# EAGLE board main1 (EAGLE 7.7.0)
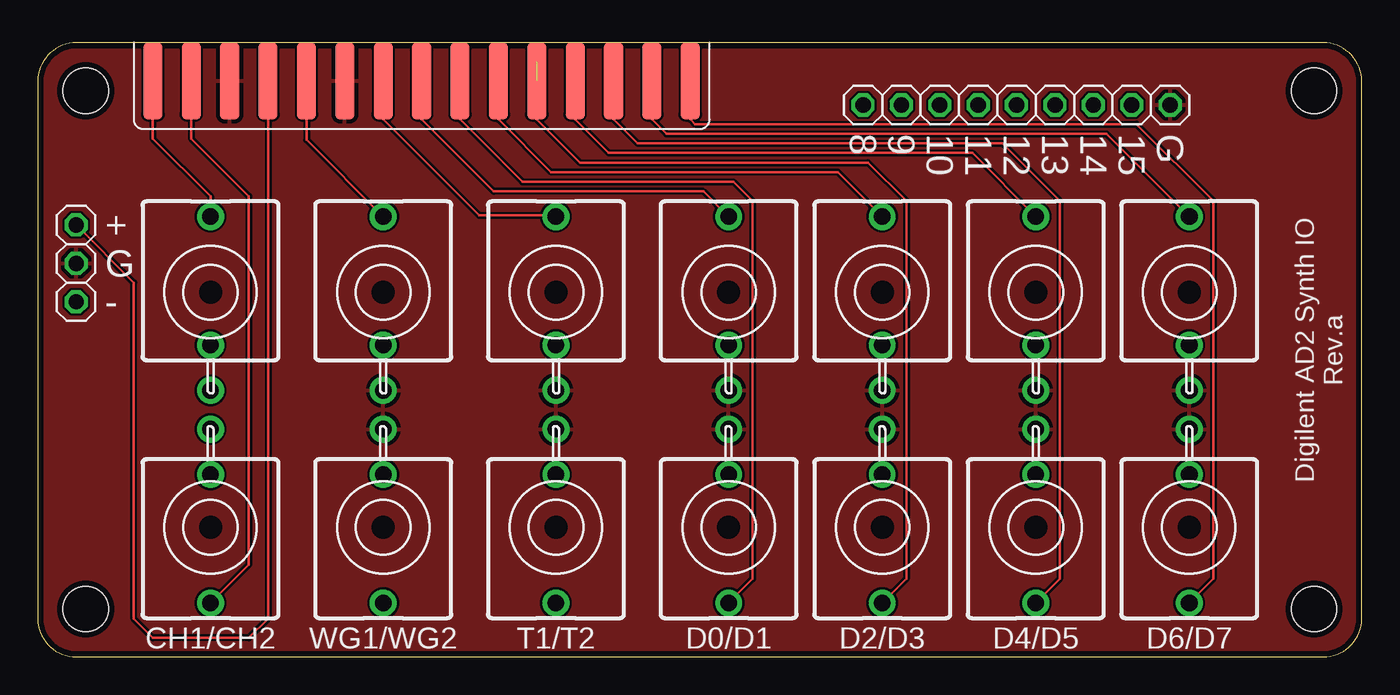
[diagram p0: board, top side]
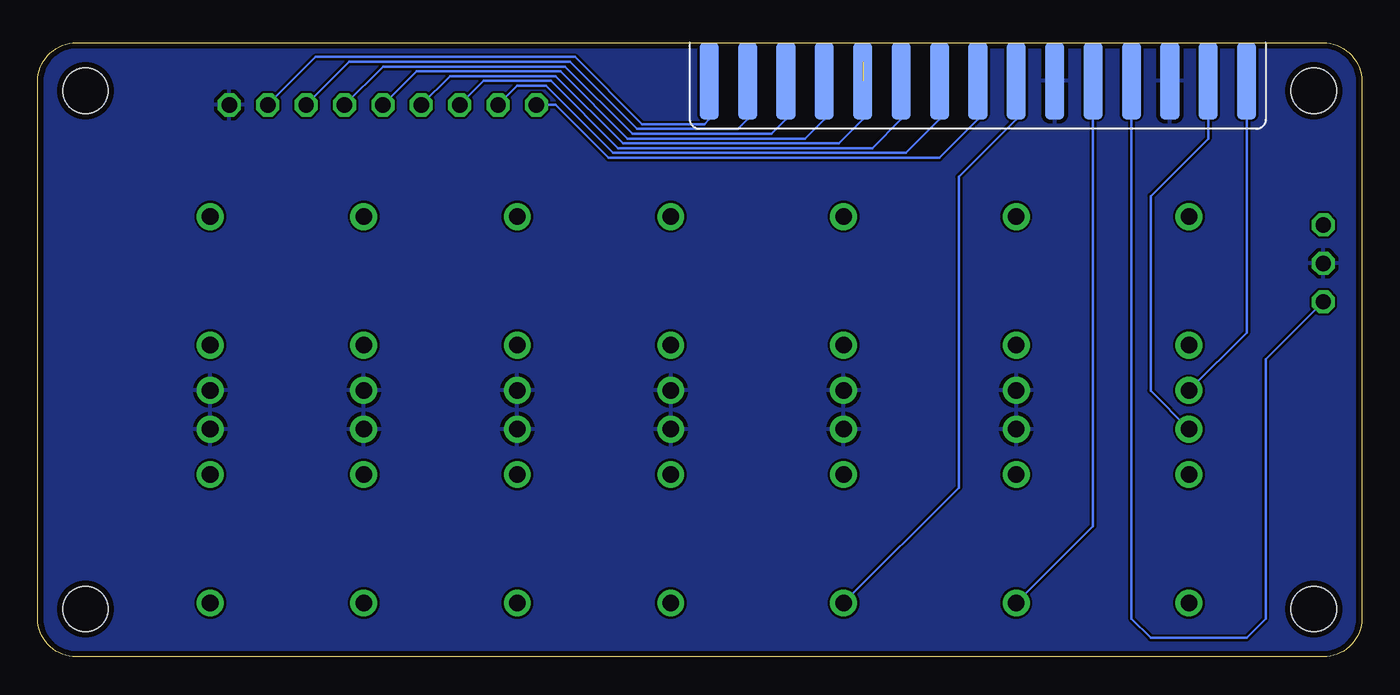
[diagram p1: board, bottom side, seen from below]

Size 87.61 x 40.63 mm. Coordinates in mm from the lower left corner, seen from the top.
Outline: 85.07,40.63 2.54,40.63 arc90 0,38.09 0,2.54 arc90 2.54,0 85.07,0 arc90 87.61,2.54 87.61,38.09 arc90 85.07,40.63
Copper layers (1*16): Top 0.0356mm / dielectric 1.5011mm / Bottom 0.0356mm
Design rules "oshpark-2layer": minimum track width 6mil, minimum drill 13mil, track to track 6mil, track to pad 6mil, pad to pad 6mil, via to via 6mil, smd to smd 6mil, copper to edge 15mil, drill to drill 6mil, minimum pad ring 7mil, minimum via ring 7mil, stop-mask expansion 2.5mil, vias tented up to drill 0mil, thermal gap 10mil
Holes 3 mm at 3.17,37.46 3.17,3.18 84.45,37.46 84.45,3.18

## Footprints (pad centres in the part's own frame; a part is rotated, then mirrored left to right if it is on the bottom)
WQP-PJ301M-12_JACK = drill 1.1 pad 1.778: P1 0,5; P2 0,-3.5; P3 0,-6.5
2X15/EDGE = smd 1.27 x 5.08: P1 -17.78,-2.54; P3 -15.24,-2.54; P5 -12.7,-2.54; P7 -10.16,-2.54; P9 -7.62,-2.54; P11 -5.08,-2.54; P13 -2.54,-2.54; P15 0,-2.54; P17 2.54,-2.54; P19 5.08,-2.54; P21 7.62,-2.54; P23 10.16,-2.54; P25 12.7,-2.54; P27 15.24,-2.54; P29 17.78,-2.54 | smd 1.27 x 5.08 bottom: P2 -17.78,-2.54; P4 -15.24,-2.54; P6 -12.7,-2.54; P8 -10.16,-2.54; P10 -7.62,-2.54; P12 -5.08,-2.54; P14 -2.54,-2.54; P16 0,-2.54; P18 2.54,-2.54; P20 5.08,-2.54; P22 7.62,-2.54; P24 10.16,-2.54; P26 12.7,-2.54; P28 15.24,-2.54; P30 17.78,-2.54
1X03/OCT = drill 1.016 octagon: 1 -2.54,0; 2 0,0; 3 2.54,0
1X09/OCT = drill 1.016 octagon: 1 -10.16,0; 2 -7.62,0; 3 -5.08,0; 4 -2.54,0; 5 0,0; 6 2.54,0; 7 5.08,0; 8 7.62,0; 9 10.16,0

## Placement (x,y rotation side)
CH1  THONKICONN  [WQP-PJ301M-12_JACK]  11.43,24.13 0 top
CH2  THONKICONN  [WQP-PJ301M-12_JACK]  11.43,8.57 180 top
DIO0  THONKICONN  [WQP-PJ301M-12_JACK]  45.72,24.13 0 top
DIO1  THONKICONN  [WQP-PJ301M-12_JACK]  45.72,8.57 180 top
DIO2  THONKICONN  [WQP-PJ301M-12_JACK]  55.88,24.13 0 top
DIO3  THONKICONN  [WQP-PJ301M-12_JACK]  55.88,8.57 180 top
DIO4  THONKICONN  [WQP-PJ301M-12_JACK]  66.04,24.13 0 top
DIO5  THONKICONN  [WQP-PJ301M-12_JACK]  66.04,8.57 180 top
DIO6  THONKICONN  [WQP-PJ301M-12_JACK]  76.2,24.13 0 top
DIO7  THONKICONN  [WQP-PJ301M-12_JACK]  76.2,8.57 180 top
JP1  [2X15/EDGE]  25.4,40.64 0 top
JP3  [1X03/OCT]  2.54,26.04 90 top
JP4  [1X09/OCT]  64.77,36.51 0 top
T1  THONKICONN  [WQP-PJ301M-12_JACK]  34.29,24.13 0 top
T2  THONKICONN  [WQP-PJ301M-12_JACK]  34.29,8.57 180 top
WG1  THONKICONN  [WQP-PJ301M-12_JACK]  22.86,24.13 0 top
WG2  THONKICONN  [WQP-PJ301M-12_JACK]  22.86,8.57 180 top

## Library data of the parts
CH1 CH2 DIO0 DIO1-DIO7 JP1 JP3 JP4 T1 T2 WG1 WG2 = _JC

## Nets
CH1+: CH1.P1 JP1.P1
CH1-: CH1.P3 JP1.P2
CH2+: CH2.P1 JP1.P3
CH2-: CH2.P3 JP1.P4
DIO0: DIO0.P1 JP1.P15
DIO1: DIO1.P1 JP1.P17
DIO2: DIO2.P1 JP1.P19
DIO3: DIO3.P1 JP1.P21
DIO4: DIO4.P1 JP1.P23
DIO5: DIO5.P1 JP1.P25
DIO6: DIO6.P1 JP1.P27
DIO7: DIO7.P1 JP1.P29
DIO8: JP1.P16 JP4.1
DIO9: JP1.P18 JP4.2
DIO10: JP1.P20 JP4.3
DIO11: JP1.P22 JP4.4
DIO12: JP1.P24 JP4.5
DIO13: JP1.P26 JP4.6
DIO14: JP1.P28 JP4.7
DIO15: JP1.P30 JP4.8
GND: DIO0.P3 DIO1.P3 DIO2.P3 DIO3.P3 DIO4.P3 DIO5.P3 DIO6.P3 DIO7.P3 JP1.P5 JP1.P6 JP1.P11 JP1.P12 JP3.2 JP4.9 T1.P3 T2.P3 WG1.P3 WG2.P3
T1: JP1.P13 T1.P1
T2: JP1.P14 T2.P1
V+: JP1.P7 JP3.3
V-: JP1.P8 JP3.1
WG1: JP1.P9 WG1.P1
WG2: JP1.P10 WG2.P1

## Tracks (layer width: path | path; a pad name or v marks a point on that pad's centre or on a via)
CH1+
  Top 0.152: JP1.P1 7.62,34.29 11.43,30.48 CH1.P1
CH1-
  Bottom 0.152: JP1.P2 7.62,21.44 CH1.P3
CH2+
  Top 0.152: JP1.P3 10.16,34.29 13.97,30.48 13.97,6.11 CH2.P1
CH2-
  Bottom 0.152: JP1.P4 10.16,34.29 13.97,30.48 13.97,17.61 CH2.P3
DIO0
  Top 0.152: 25.4,39.37 JP1.P15 25.4,35.56 30.16,30.8 44.05,30.8 DIO0.P1
DIO1
  Top 0.152: JP1.P17 27.94,35.56 32.07,31.43 46.04,31.43 47.31,30.16 47.31,5.16 DIO1.P1
DIO2
  Top 0.152: JP1.P19 30.48,35.56 33.97,32.07 52.94,32.07 DIO2.P1
DIO3
  Top 0.152: JP1.P21 33.02,35.56 35.88,32.7 54.93,32.7 57.47,30.16 57.47,5.16 DIO3.P1
DIO4
  Top 0.152: JP1.P23 35.56,35.56 37.78,33.34 61.83,33.34 DIO4.P1
DIO5
  Top 0.152: JP1.P25 38.1,35.56 39.69,33.97 63.82,33.97 67.63,30.16 67.63,5.16 DIO5.P1
DIO6
  Top 0.152: JP1.P27 40.64,35.56 41.59,34.61 | 41.59,34.61 70.72,34.61 | 70.72,34.61 DIO6.P1 | 41.59,34.61 70.72,34.61
DIO7
  Top 0.152: JP1.P29 43.18,35.56 43.5,35.24 72.71,35.24 77.79,30.16 77.79,5.16 DIO7.P1
DIO8
  Bottom 0.152: JP4.1 53.34,36.51 49.85,33.02 27.94,33.02 25.4,35.56 JP1.P16
DIO9
  Bottom 0.152: JP1.P18 27.94,35.56 30.16,33.34 49.53,33.34 53.98,37.78 55.88,37.78 JP4.2
DIO10
  Bottom 0.152: JP1.P20 30.48,35.56 32.38,33.66 49.21,33.66 53.66,38.1 58.1,38.1 JP4.3
DIO11  (1 unrouted)
  Bottom 0.152: 33.02,39.37 33.02,35.56 34.61,33.97 48.9,33.97 53.34,38.42 60.33,38.42 JP4.4
DIO12
  Bottom 0.152: JP1.P24 35.56,35.56 36.83,34.29 48.58,34.29 53.02,38.74 62.55,38.74 JP4.5
DIO13
  Bottom 0.152: JP1.P26 38.1,35.56 39.05,34.61 48.26,34.61 52.7,39.05 64.77,39.05 JP4.6
DIO14
  Bottom 0.152: JP1.P28 40.64,35.56 41.27,34.93 47.94,34.93 52.39,39.37 66.99,39.37 JP4.7
DIO15
  Bottom 0.152: JP1.P30 43.18,35.56 43.5,35.24 47.62,35.24 52.07,39.69 69.22,39.69 JP4.8
GND
  pour Bottom: -1.27,43.18 90.17,43.18 90.17,-2.54 -2.54,-2.54 -2.54,43.18
  pour Top: -1.27,41.91 88.9,41.91 88.9,-1.27 -1.27,-1.27
T1
  Top 0.152: JP1.P13 22.86,35.56 29.21,29.21 34.21,29.21 T1.P1
T2
  Bottom 0.152: JP1.P14 22.86,35.56 26.67,31.75 26.67,11.19 T2.P1
V+
  Top 0.152: JP1.P7 15.24,2.54 13.97,1.27 7.62,1.27 6.35,2.54 6.35,24.77 JP3.3
V-
  Bottom 0.152: JP1.P8 15.24,2.54 13.97,1.27 7.62,1.27 6.35,2.54 6.35,19.68 JP3.1
WG1
  Top 0.152: JP1.P9 17.78,34.21 WG1.P1
WG2
  Bottom 0.152: JP1.P10 17.78,8.65 WG2.P1

## Text on the board
tNames: 8 | 9 | 10 | 11 | 12 | 13 | 14 | 15 | G | + | G | - | Digilent AD2 Synth IO / Rev.a | CH1/CH2 | WG1/WG2 | T1/T2 | D0/D1 | D2/D3 | D4/D5 | D6/D7